# Altium PCB SPCE061A最小系统.PcbDoc (part 1 of 2)
Units mm, origin at the board's own origin, x right, y up, seen from the top; angles counter-clockwise.
Board outline 152.4 x 101.6 mm, 2 copper layers (Top Layer, Bottom Layer); 47 components, 59 nets, 230 pads, 3 vias.
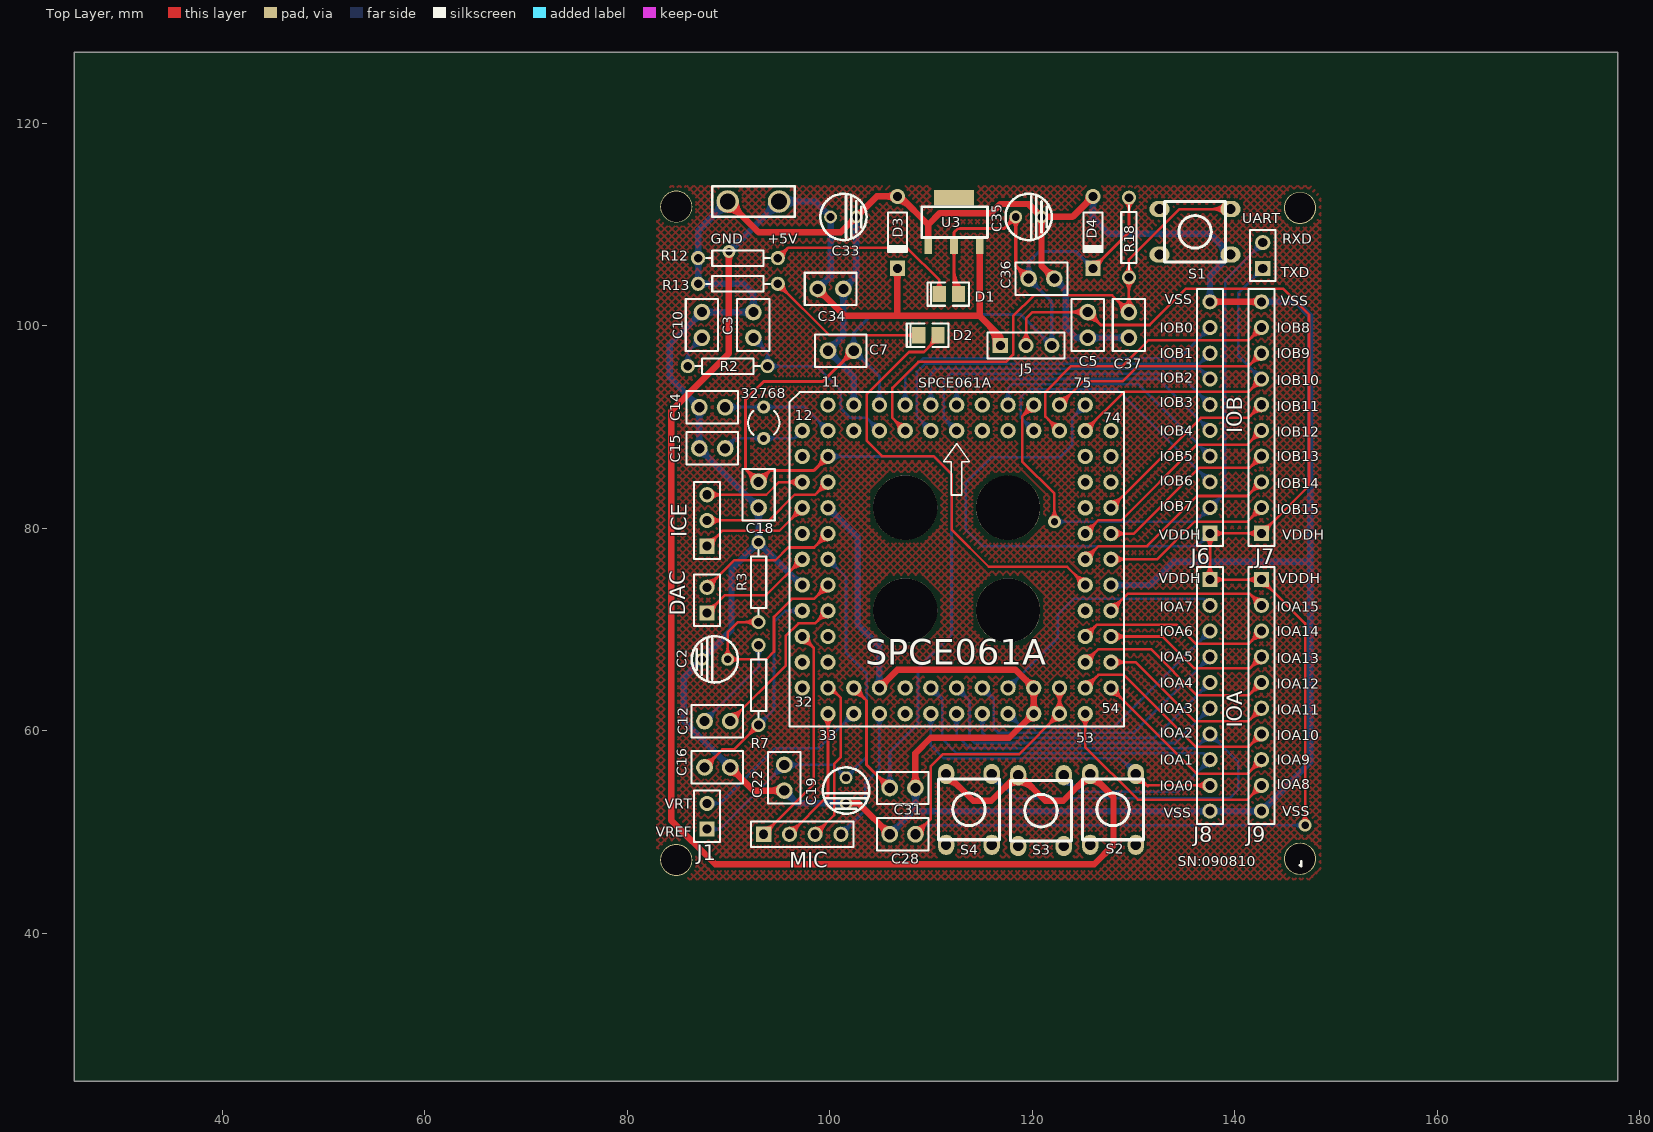
[diagram p0: Top Layer view]
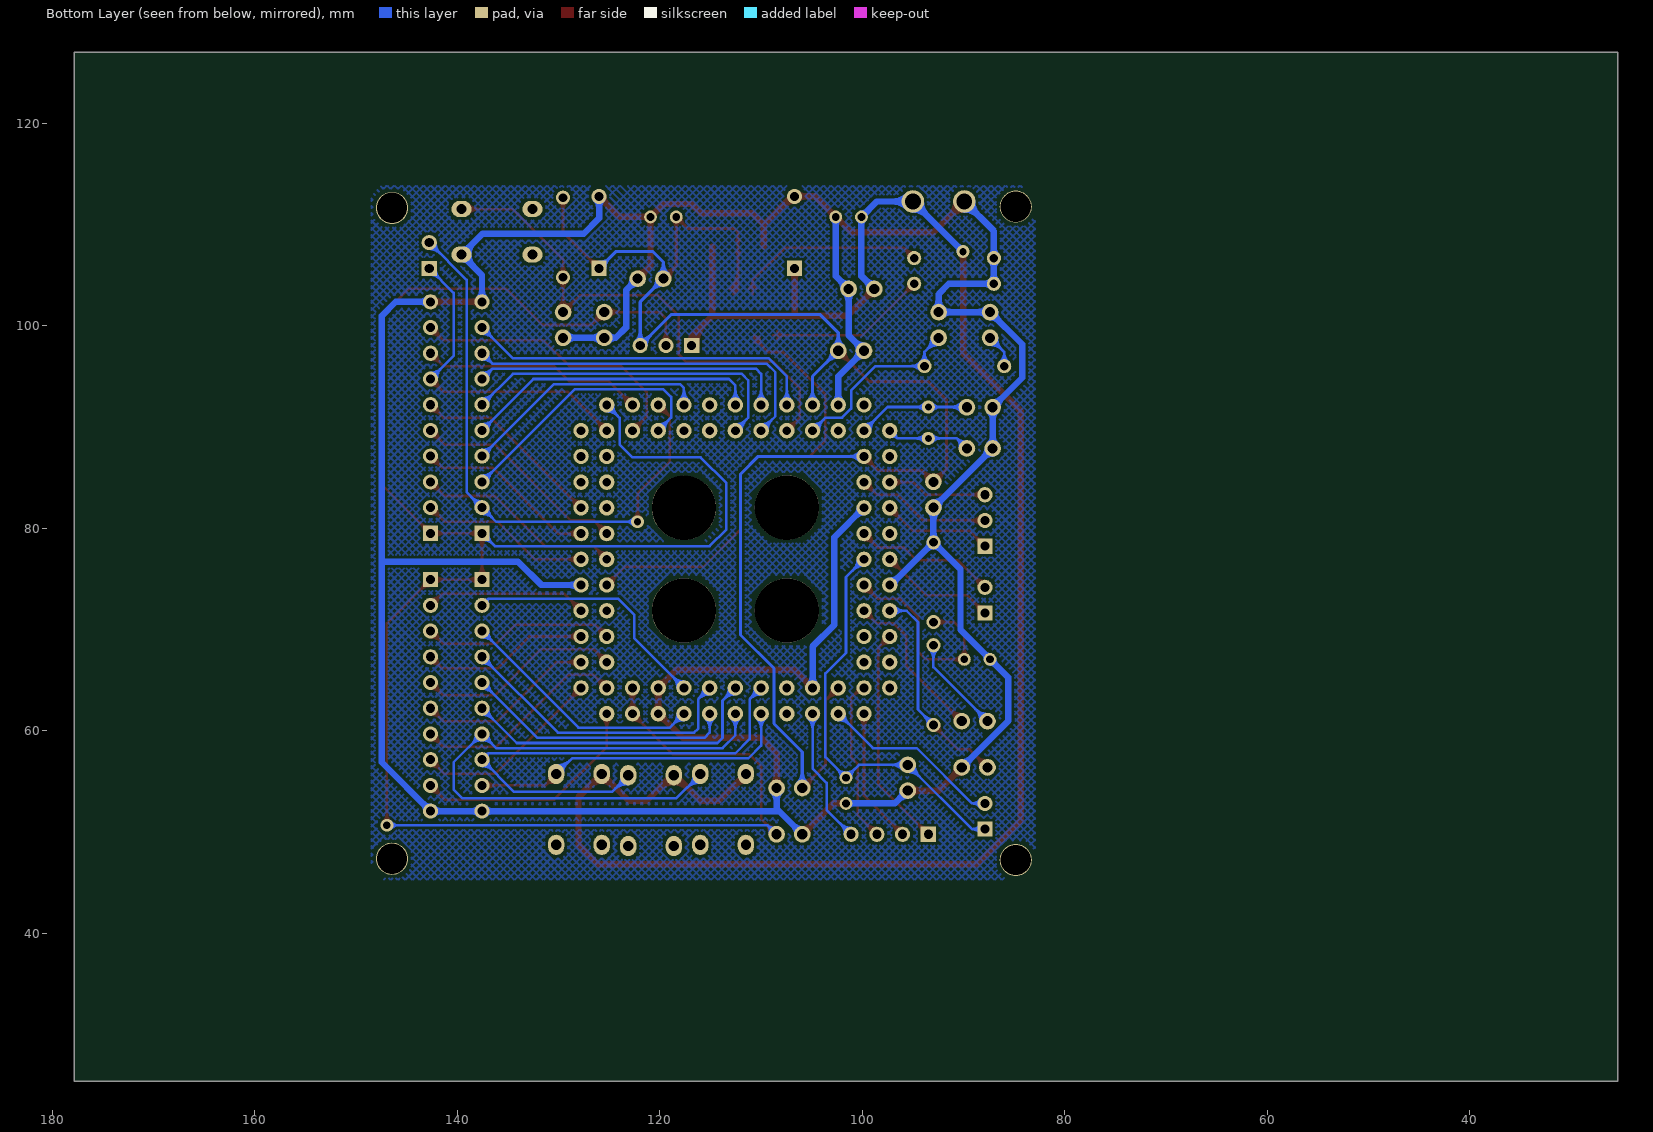
[diagram p1: Bottom Layer view, seen from below]

## Layer stack, top to bottom
Top Layer: signal copper 0.0356
Dielectric: dielectric 0.32, FR-4, Dk 4.8
Bottom Layer: signal copper 0.0356

## Board outline
25.4,25.4 177.8,25.4 177.8,127 25.4,127

## Design rules (kind name [scope] priority, off if disabled: settings)
Clearance [All] p1: gap=0.254
ComponentClearance [All] p1: gap=0.254 collisioncheckmode=3 verticalgap=0.254
PolygonConnect [All] p1: connectstyle=Relief reliefconductorwidth=0.254 reliefentries=4 polygonreliefangle="90 Angle"
RoutingVias [All] p1: holewidth=0.711 width=1.27 viastyle="Through Hole" minholewidth=0.711 minwidth=1.27 maxholewidth=0.711 maxwidth=1.27
SolderMaskExpansion [All] p1: expansion=0.102
TestPointUsage [All] p1: valid=0 allowmultiple=FALSE
Testpoint [All] p1: side=15 testpointundercomponent=TRUE minsize=1.016 maxsize=2.54 preferedsize=1.524 minholesize=0 maxholesize=1.016 preferedholesize=0.813 testpointgrid=0.025 style=1023 order=0123456789
Width VDD [InNet('VDD')] p1: maxlimit=0.305 minlimit=0.305 preferedwidth=0.305
Width VCC [InNet('V5')] p2: maxlimit=0.635 minlimit=0.635 preferedwidth=0.635
Width VSS [InNet('VSS')] p3: maxlimit=0.635 minlimit=0.635 preferedwidth=0.635
Width [All] p4: maxlimit=0.254 minlimit=0.254 preferedwidth=0.254
17 further rules are at their usual default settings.

## Components (designator, comment, footprint, x,y, rotation, side; value= is the part's Value field where it differs from the comment)
32768 "XTAL" BCY-W2/D3.1 93.472,90.424 r0 top
+5V "POWER" POWERPF 89.916,112.268 r0 top
C2 "Cap Pol1" cap2 94.488,67.056 r180 top
C3 "Cap" CAPR2.54-5.1x3.2 92.456,100.076 r270 top
C5 "Cap" CAPR2.54-5.1x3.2 125.476,100.076 r90 top
C7 "Cap" CAPR2.54-5.1x3.2 101.092,97.536 r0 top
C10 "Cap" CAPR2.54-5.1x3.2 87.376,100.076 r270 top
C12 "Cap" CAPR2.54-5.1x3.2 88.9,60.96 r180 top
C14 "Cap" CAPR2.54-5.1x3.2 88.392,91.948 r0 top
C15 "Cap" CAPR2.54-5.1x3.2 88.392,87.884 r180 top
C16 "Cap" CAPR2.54-5.1x3.2 88.9,56.388 r0 top
C18 "Cap" CAPR2.54-5.1x3.2 92.964,83.312 r90 top
C19 "Cap Pol1" cap2 101.6,59.944 r270 top
C22 "Cap" CAPR2.54-5.1x3.2 95.504,55.372 r90 top
C28 "Cap" CAPR2.54-5.1x3.2 107.188,49.784 r0 top
C31 "Cap" CAPR2.54-5.1x3.2 107.188,54.356 r180 top
C33 "Cap Pol1" cap2 95.504,110.744 r0 top
C34 "Cap" CAPR2.54-5.1x3.2 100.076,103.632 r180 top
C35 "Cap Pol1" cap2 113.792,110.744 r0 top
C36 "Cap" CAPR2.54-5.1x3.2 120.904,104.648 r180 top
C37 "Cap" CAPR2.54-5.1x3.2 129.54,100.076 r270 top
D1 "LED3" "SMD _LED" 111.76,103.124 r0 top
D2 "LED3" "SMD _LED" 109.728,99.06 r0 top
D3 "Diode 1N4148" DIO7.1-3.9x1.9 106.68,109.22 r270 top
D4 "Diode 1N4148" DIO7.1-3.9x1.9 125.984,109.22 r270 top
DAC "Header 2" HDR1X2 87.884,71.628 r90 top (schematic designator DAC_input)
ICE "Header 3" HDR1X3 87.884,78.232 r90 top
J1 "Header 2" HDR1X2 87.884,50.292 r90 top
J5 "Header 3" HDR1X3 116.84,98.044 r0 top
J6 "IOB0~IOB7" HDR1X10 137.541,79.502 r90 top
J7 "IOB8~IOB15" HDR1X10 142.621,79.502 r90 top
J8 "IOA0~IOA7" HDR1X10 137.541,74.93 r270 top
J9 "IOA8~IOA15" HDR1X10 142.621,74.93 r270 top
MIC "Header 4" HDR1X4 93.472,49.784 r0 top
R2 "Res2" RSE 89.916,96.012 r0 top
R3 "Res2" RSE 92.964,74.676 r90 top
R7 "Res2" RSE 92.964,64.516 r90 top
R12 "Res2" RSE 90.932,106.68 r180 top
R13 "Res2" RSE 90.932,104.14 r180 top
R18 "Res2" RSE 129.54,108.712 r90 top
S1 "KEY" an-6*6 142.24,104.14 r0 top
S2 "KEY2" an-6*6 133.096,58.42 r90 top
S3 "KEY3" an-6*6 125.984,58.293 r90 top
S4 "KEY4" an-6*6 118.872,58.42 r90 top
SPCE061A "PLCC84" SPCE061A_PLCC84 -647.827,740.156 r90 top
U3 "LM7833" A1117 112.268,113.792 r0 top
UART "Header 2" HDR1X2 142.748,105.664 r90 top

## Footprints (in the part's own frame and the unit in brackets; to place one, negate y for a bottom-side part, rotate by r counter-clockwise, add the part's x,y. Pads: shape width x height; smd on the part's side, far side on the other; paste and mask are expansions set on the pad)
A1117 [mil] "3.3V"
  rect 30x60 smd: 1(-100,-235) 2(0,-235) 3(100,-235)
  rect 155x60 smd: 4(0,-45)
  silkscreen extent -125,-200 130,-80
an-6*6 [mm] "按键"
  oval 2x1.6 hole 1: 1(-9.675,7.381) 1(-2.675,7.381) 2(-9.675,2.881) 2(-2.675,2.881)
  silkscreen extent -9.17,2.13 -3.17,8.13
BCY-W2/D3.1 [mm] "Crystal, Thru-Hole; 2 Leads; Body 3.1 x 8.2 mm (Dia.xH)"
  round 1.3 hole 0.7: 1(0,1.55) 2(0,-1.55)
  silkscreen extent -1.55,-1.19 1.55,1.17
cap2 [mil]
  round 50 hole 30: 1(180,0) 2(280,0)
  silkscreen extent 140,-90 320,90
CAPR2.54-5.1x3.2 [mm] "Capacitor, Ceramic, Thru-Hole, Dipped Radial; Body 5.1 x 3.2 mm (WxT) Pin Spacing 2.54 mm (typ)"
  round 1.65 hole 1: 1(-1.27,0) 2(1.27,0)
  silkscreen extent -2.55,-1.6 2.55,1.6
DIO7.1-3.9x1.9 [mm] "Diode, Axial; Body 3.8 x 1.9 mm (LxDia. max), Lead Dia. 0.53 mm (max)"
  round 1.5 hole 0.9: 1(-3.55,0)
  rect 1.5x1.5 hole 0.9: 2(3.55,0)
  silkscreen extent -1.95,-0.95 2.05,0.95
HDR1X2 [mm] "Connector; Header; 2 Position"
  rect 1.5x1.5 hole 0.9: 1(0,0)
  round 1.5 hole 0.9: 2(2.54,0)
  silkscreen extent -1.27,-1.27 3.81,1.27
HDR1X3 [mm] "Connector; Header; 3 Position"
  rect 1.5x1.5 hole 0.9: 1(0,0)
  round 1.5 hole 0.9: 2(2.54,0) 3(5.08,0)
  silkscreen extent -1.27,-1.27 6.35,1.27
HDR1X4 [mm] "Connector; Header; 4 Position"
  rect 1.5x1.5 hole 0.9: 1(0,0)
  round 1.5 hole 0.9: 2(2.54,0) 3(5.08,0) 4(7.62,0)
  silkscreen extent -1.27,-1.27 8.89,1.27
HDR1X10 [mm] "Connector; Header; 10 Position"
  rect 1.5x1.5 hole 0.9: 1(0,0)
  round 1.5 hole 0.9: 2(2.54,0) 3(5.08,0) 4(7.62,0) 5(10.16,0) 6(12.7,0) 7(15.24,0) 8(17.78,0) 9(20.32,0) 10(22.86,0)
  silkscreen extent -1.27,-1.27 24.13,1.27
POWERPF [mm] "POWER"
  round 2.224 hole 1.562: 1(0,0) 2(5.08,0)
  silkscreen extent -1.52,-1.52 6.6,1.52
RSE [mm] "直插电阻1/8W"
  round 1.4 hole 0.85: 1(-3.937,0) 2(3.937,0)
  silkscreen extent -3.17,-0.76 3.17,0.76
"SMD _LED" [mm] "SMT LED; 2 Leads"
  rect 1.3x1.6 smd: 1(0.95,0) 2(-0.95,0)
  silkscreen extent -2.13,-1.15 2,1.15
SPCE061A_PLCC84 [mil]
  round 60 hole 34: 1(-25511,-29935) 2(-25611,-29935) 3(-25511,-29835) 4(-25611,-29835) 5(-25511,-29735) 6(-25611,-29735) 7(-25511,-29635) 8(-25611,-29635) 9(-25511,-29535) 10(-25611,-29535) 11(-25511,-29435) 12(-25611,-29335) 13(-25611,-29435) 14(-25711,-29335) 15(-25711,-29435) 16(-25811,-29335) 17(-25811,-29435) 18(-25911,-29335) 19(-25911,-29435) 20(-26011,-29335) 21(-26011,-29435) 22(-26111,-29335) 23(-26111,-29435) 24(-26211,-29335) 25(-26211,-29435) 26(-26311,-29335) 27(-26311,-29435) 28(-26411,-29335) 29(-26411,-29435) 30(-26511,-29335) 31(-26511,-29435) 32(-26611,-29335) 33(-26711,-29435) 34(-26611,-29435) 35(-26711,-29535) 36(-26611,-29535) 37(-26711,-29635) 38(-26611,-29635) 39(-26711,-29735) 40(-26611,-29735) 41(-26711,-29835) 42(-26611,-29835) 43(-26711,-29935) 44(-26611,-29935) 45(-26711,-30035) 46(-26611,-30035) 47(-26711,-30135) 48(-26611,-30135) 49(-26711,-30235) 50(-26611,-30235) 51(-26711,-30335) 52(-26611,-30335) 53(-26711,-30435) 54(-26611,-30535) 55(-26611,-30435) 56(-26511,-30535) 57(-26511,-30435) 58(-26411,-30535) 59(-26411,-30435) 60(-26311,-30535) 61(-26311,-30435) 62(-26211,-30535) 63(-26211,-30435) 64(-26111,-30535) 65(-26111,-30435) 66(-26011,-30535) 67(-26011,-30435) 68(-25911,-30535) 69(-25911,-30435) 70(-25811,-30535) 71(-25811,-30435) 72(-25711,-30535) 73(-25711,-30435) 74(-25611,-30535) 75(-25511,-30435) 76(-25611,-30435) 77(-25511,-30335) 78(-25611,-30335) 79(-25511,-30235) 80(-25611,-30235) 81(-25511,-30135) 82(-25611,-30135) 83(-25511,-30035) 84(-25611,-30035)
  silkscreen extent -26761,-30585 -25461,-29285

## Part data
32768: "Crystal Oscillator"
C2 C19 C33 C35: "Polarized Capacitor (Radial)"
C3 C5 C7 C10 C12 C14 C15 C16 C18 C22 C28 C31 C34 C36 C37: "Capacitor"
D1 D2: "Typical BLUE SiC LED"
D3 D4: "High Conductance Fast Diode"
DAC J1 UART: "Header, 2-Pin"
ICE J5: "Header, 3-Pin"
J6 J7 J8 J9: library part "Header 10", "Header, 10-Pin"
MIC: "Header, 4-Pin"
R2 R3 R7 R12 R13 R18: "Resistor"
S2 S3 S4: library part KEY
SPCE061A: library part SPCE061A_PLCC84
U3: library part LM7805CT

## Free pads (board coordinates)
  round 6.35 hole 6.35: 1(107.442,71.882) 2(117.602,71.882) 3(117.602,82.017) 4(107.442,82.042)
  round 3.175 hole 2.997: 5(84.836,111.76) 6(146.431,111.633) 7(84.836,47.244) 8(146.431,47.371)

## Via types
v1: diameter 1.27, hole 0.711, Top Layer to Bottom Layer, 3 vias

## Nets (pads, with @x,y where several pads share a name; then routed paths per layer and width w, separated by ;. In a path a pad name is that pad's centre, name@x,y a point inside that pad or via, vN(x,y) a via of type N, cw(c..) or ccw(c..) an arc to the next point about the centre after c; other vN are vias at no path point)
ICE_EN: ICE.3 SPCE061A.16 | length 17.5
  Top Layer w0.254: ICE.3@87.884,83.312 93.726,83.312 94.971,84.557 SPCE061A.16@97.282,84.557 ; ICE.3@88.145,83.051 cw(c88.775,82.421) 88.775,83.312 cw(c88.775,84.203) ICE.3@88.145,83.573 ; ICE.3@88.325,82.871 cw(c89.388,81.808) 89.388,83.312 cw(c89.388,84.816) ICE.3@88.325,83.753 ; SPCE061A.16@96.833,84.108 ccw(c95.749,83.024) 95.749,84.557 ccw(c95.749,86.09) SPCE061A.16@96.833,85.006 ; SPCE061A.16@97.013,84.287 ccw(c96.362,83.637) 96.362,84.557 ccw(c96.362,85.476) SPCE061A.16@97.013,84.826
ICE_SCK: ICE.2 SPCE061A.17 | length 21.4
  Top Layer w0.254: ICE.2@87.63,80.772 93.98,80.772 96.52,83.312 98.552,83.312 99.797,84.557 SPCE061A.17@99.822,84.557 ; ICE.2@88.145,80.511 cw(c88.775,79.881) 88.775,80.772 cw(c88.775,81.663) ICE.2@88.145,81.033 ; ICE.2@88.325,80.331 cw(c89.388,79.268) 89.388,80.772 cw(c89.388,82.276) ICE.2@88.325,81.213 ; 98.695,83.455 cw(c99.822,82.327) SPCE061A.17@99.822,83.922 ; 98.756,83.516 ccw(c97.715,84.557) SPCE061A.17@99.187,84.557 ; 99.128,83.888 cw(c99.822,83.194) SPCE061A.17@99.822,84.176 ; 99.19,83.95 ccw(c98.583,84.557) SPCE061A.17@99.441,84.557
ICE_SDA: ICE.1 SPCE061A.18 | length 18.6
  Top Layer w0.254: ICE.1@87.884,78.232 89.408,79.756 95.021,79.756 SPCE061A.18@97.282,82.017 ; ICE.1@87.884,78.601 ccw(c87.884,79.492) 88.514,78.862 ccw(c89.144,78.232) ICE.1@88.253,78.232 ; ICE.1@87.884,78.855 ccw(c87.884,80.359) 88.948,79.296 ccw(c90.011,78.232) ICE.1@88.507,78.232 ; SPCE061A.18@96.647,82.017 cw(c95.114,82.017) 96.198,80.933 cw(c97.282,79.849) SPCE061A.18@97.282,81.382 ; SPCE061A.18@96.901,82.017 cw(c95.981,82.017) 96.632,81.366 cw(c97.282,80.716) SPCE061A.18@97.282,81.636
IOA0: J8.9 S2.2@130.215,55.745 SPCE061A.41 | length 46.4
  Top Layer w0.254: S2.2@130.215,55.745 130.215,55.713 131.318,54.61 J8.9@137.541,54.61 ; S2.2@130.279,55.131 cw(c130.417,54.248) 131.048,54.88 ; S2.2@130.318,54.88 cw(c130.512,53.636) 131.402,54.526 ; S2.2@130.888,55.545 ccw(c132.108,55.545) 131.245,54.683 ; J8.9@137.1,54.169 ccw(c136.037,53.106) 136.037,54.61 ccw(c136.037,56.114) J8.9@137.1,55.051 ; J8.9@137.28,54.349 ccw(c136.65,53.719) 136.65,54.61 ccw(c136.65,55.501) J8.9@137.28,54.871
  Bottom Layer w0.254: SPCE061A.41@109.533,61.248 cw(c108.449,60.164) 109.982,60.164 cw(c111.515,60.164) SPCE061A.41@110.431,61.248 ; SPCE061A.41@109.713,61.427 cw(c109.062,60.777) 109.982,60.777 cw(c110.902,60.777) SPCE061A.41@110.251,61.427 ; SPCE061A.41@109.982,61.697 109.982,58.547 111.252,57.277 128.651,57.277 S2.2@130.183,55.745 ; 128.767,57.161 ccw(c130.086,58.479) S2.2@130.181,56.617 ; 129.171,56.757 ccw(c130.125,57.71) S2.2@130.194,56.363 ; 129.231,56.697 cw(c128.478,55.945) S2.2@129.542,55.945
IOA1: J8.8 S3.2@123.103,55.618 SPCE061A.42 | length 61.4
  Bottom Layer w0.254: SPCE061A.42@109.982,63.602 cw(c109.982,62.007) 111.109,63.135 ; SPCE061A.42@109.982,63.856 cw(c109.982,62.874) 110.676,63.568 ; SPCE061A.42@109.982,64.237 110.007,64.237 111.125,63.119 111.125,59.182 112.522,57.785 136.906,57.785 ; SPCE061A.42@110.363,64.237 ccw(c111.221,64.237) 110.614,63.63 ; SPCE061A.42@110.617,64.237 ccw(c112.089,64.237) 111.048,63.196 ; S3.2@123.103,54.745 cw(c123.103,52.715) 124.539,54.15 ; S3.2@123.103,54.999 cw(c123.103,53.582) 124.105,54.584 ; S3.2@123.103,55.618 123.103,55.586 124.714,53.975 134.366,53.975 J8.8@137.541,57.15 136.906,57.785 ; S3.2@123.103,55.713 S3.2@123.103,55.745 ; S3.2@123.776,55.418 ccw(c124.996,55.418) 124.133,54.556 ; J8.8@136.918,57.15 cw(c135.414,57.15) 136.477,56.086 cw(c137.541,55.023) J8.8@137.541,56.527 ; J8.8@136.974,57.408 ccw(c136.669,57.548) 136.906,57.785 ; J8.8@137.172,57.15 cw(c136.281,57.15) 136.911,56.52 cw(c137.541,55.89) J8.8@137.541,56.781 ; J8.8@137.283,57.717 cw(c137.143,58.022) 136.906,57.785
IOA2: J8.7 S4.2@115.991,55.745 SPCE061A.43 | length 75.6
  Bottom Layer w0.254: SPCE061A.43@112.073,61.248 cw(c110.989,60.164) 112.522,60.164 cw(c114.055,60.164) SPCE061A.43@112.971,61.248 ; SPCE061A.43@112.253,61.427 cw(c111.602,60.777) 112.522,60.777 cw(c113.442,60.777) SPCE061A.43@112.791,61.427 ; SPCE061A.43@112.522,61.697 112.522,59.563 113.792,58.293 136.144,58.293 J8.7@137.541,59.69 140.335,56.896 140.335,54.229 139.446,53.34 118.364,53.34 115.991,55.713 S4.2@115.991,55.745 ; S4.2@115.991,54.872 cw(c115.991,52.842) 117.427,54.277 ; S4.2@115.991,55.126 cw(c115.991,53.709) 116.993,54.711 ; S4.2@116.664,55.545 ccw(c117.884,55.545) 117.021,54.683 ; J8.7@136.918,59.69 cw(c135.414,59.69) 136.477,58.626 cw(c137.541,57.563) 137.541,59.067 cw(c137.541,57.563) 138.605,58.626 cw(c139.668,59.69) J8.7@138.164,59.69 ; J8.7@137.172,59.69 cw(c136.281,59.69) 136.911,59.06 cw(c137.541,58.43) 137.541,59.321 cw(c137.541,58.43) 138.171,59.06 cw(c138.801,59.69) J8.7@137.91,59.69
IOA3: J8.6 SPCE061A.44 | length 38.5
  Bottom Layer w0.254: SPCE061A.44@112.522,63.602 cw(c112.522,62.007) 113.649,63.135 ; SPCE061A.44@112.522,63.856 cw(c112.522,62.874) 113.216,63.568 ; SPCE061A.44@112.522,64.237 112.547,64.237 113.792,62.992 113.792,59.309 114.3,58.801 134.112,58.801 J8.6@137.541,62.23 ; SPCE061A.44@112.903,64.237 ccw(c113.761,64.237) 113.154,63.63 ; SPCE061A.44@113.157,64.237 ccw(c114.629,64.237) 113.588,63.196 ; J8.6@136.918,62.23 cw(c135.414,62.23) 136.477,61.166 cw(c137.541,60.103) J8.6@137.541,61.607 ; J8.6@137.172,62.23 cw(c136.281,62.23) 136.911,61.6 cw(c137.541,60.97) J8.6@137.541,61.861
IOA4: J8.5 SPCE061A.45 | length 34.4
  Bottom Layer w0.254: SPCE061A.45@114.613,61.248 cw(c113.529,60.164) 115.062,60.164 cw(c116.595,60.164) SPCE061A.45@115.511,61.248 ; SPCE061A.45@114.793,61.427 cw(c114.142,60.777) 115.062,60.777 cw(c115.982,60.777) SPCE061A.45@115.331,61.427 ; SPCE061A.45@115.062,61.697 115.062,59.817 115.57,59.309 132.08,59.309 J8.5@137.541,64.77 ; J8.5@136.918,64.77 cw(c135.414,64.77) 136.477,63.706 cw(c137.541,62.643) J8.5@137.541,64.147 ; J8.5@137.172,64.77 cw(c136.281,64.77) 136.911,64.14 cw(c137.541,63.51) J8.5@137.541,64.401
IOA5: J8.4 SPCE061A.46 | length 36.7
  Bottom Layer w0.254: SPCE061A.46@115.062,63.602 cw(c115.062,62.007) 116.189,63.135 ; SPCE061A.46@115.062,63.856 cw(c115.062,62.874) 115.756,63.568 ; SPCE061A.46@115.062,64.237 115.087,64.237 116.205,63.119 116.205,60.198 116.586,59.817 130.048,59.817 J8.4@137.541,67.31 ; SPCE061A.46@115.443,64.237 ccw(c116.301,64.237) 115.694,63.63 ; SPCE061A.46@115.697,64.237 ccw(c117.169,64.237) 116.128,63.196 ; J8.4@136.918,67.31 cw(c135.414,67.31) 136.477,66.246 cw(c137.541,65.183) J8.4@137.541,66.687 ; J8.4@137.172,67.31 cw(c136.281,67.31) 136.911,66.68 cw(c137.541,66.05) J8.4@137.541,66.941
IOA6: J8.3 SPCE061A.47 | length 32.1
  Bottom Layer w0.254: SPCE061A.47@117.602,61.062 cw(c117.602,59.467) 118.729,60.595 ; SPCE061A.47@117.602,61.316 cw(c117.602,60.334) 118.296,61.028 ; SPCE061A.47@117.602,61.697 117.627,61.697 118.999,60.325 128.016,60.325 J8.3@137.541,69.85 ; SPCE061A.47@117.983,61.697 ccw(c118.841,61.697) 118.234,61.09 ; SPCE061A.47@118.237,61.697 ccw(c119.709,61.697) 118.668,60.656 ; J8.3@136.918,69.85 cw(c135.414,69.85) 136.477,68.786 cw(c137.541,67.723) J8.3@137.541,69.227 ; J8.3@137.172,69.85 cw(c136.281,69.85) 136.911,69.22 cw(c137.541,68.59) J8.3@137.541,69.481
IOA7: J8.2 SPCE061A.48 | length 29.9
  Bottom Layer w0.254: SPCE061A.48@117.602,64.237 122.501,69.136 122.501,71.447 124.079,73.025 136.906,73.025 ; SPCE061A.48@117.602,64.618 ccw(c117.602,65.537) 118.252,64.887 ccw(c118.903,64.237) SPCE061A.48@117.983,64.237 ; SPCE061A.48@117.602,64.872 ccw(c117.602,66.405) 118.686,65.321 ccw(c119.77,64.237) SPCE061A.48@118.237,64.237 ; J8.2@136.974,72.648 ccw(c136.669,72.788) 136.906,73.025 ; J8.2@137.283,72.957 cw(c137.143,73.262) 136.906,73.025 ; J8.2@137.541,72.39 136.906,73.025
IOA8: J9.9 SPCE061A.53 | length 31.1
  Top Layer w0.254: SPCE061A.53@124.773,61.248 cw(c123.689,60.164) 125.222,60.164 cw(c126.755,60.164) SPCE061A.53@125.671,61.248 ; SPCE061A.53@124.953,61.427 cw(c124.302,60.777) 125.222,60.777 cw(c126.142,60.777) SPCE061A.53@125.491,61.427 ; SPCE061A.53@125.247,61.697 SPCE061A.53@125.222,61.697 125.222,58.42 130.429,53.213 141.224,53.213 J9.9@142.621,54.61 ; J9.9@141.998,54.61 cw(c140.494,54.61) 141.557,53.546 cw(c142.621,52.483) J9.9@142.621,53.987 ; J9.9@142.252,54.61 cw(c141.361,54.61) 141.991,53.98 cw(c142.621,53.35) J9.9@142.621,54.241
IOA9: J9.8 SPCE061A.54 | length 26.6
  Top Layer w0.254: SPCE061A.54@127.762,63.602 cw(c127.762,62.069) 128.846,63.153 cw(c129.93,64.237) SPCE061A.54@128.397,64.237 ; SPCE061A.54@127.762,63.856 cw(c127.762,62.936) 128.412,63.586 cw(c129.063,64.237) SPCE061A.54@128.143,64.237 ; SPCE061A.54@127.762,64.237 136.246,55.753 141.224,55.753 J9.8@142.621,57.15 ; J9.8@141.998,57.15 cw(c140.494,57.15) 141.557,56.086 cw(c142.621,55.023) J9.8@142.621,56.527 ; J9.8@142.252,57.15 cw(c141.361,57.15) 141.991,56.52 cw(c142.621,55.89) J9.8@142.621,56.781
IOA10: J9.7 SPCE061A.55 | length 29
  Top Layer w0.254: SPCE061A.55@125.222,64.237 126.517,65.532 129.032,65.532 136.144,58.42 141.351,58.42 J9.7@142.621,59.69 ; SPCE061A.55@125.222,64.618 ccw(c125.222,65.537) 125.872,64.887 ccw(c126.523,64.237) SPCE061A.55@125.603,64.237 ; SPCE061A.55@125.222,64.872 ccw(c125.222,66.405) 126.306,65.321 ccw(c127.39,64.237) SPCE061A.55@125.857,64.237 ; J9.7@141.998,59.69 cw(c140.494,59.69) 141.557,58.626 cw(c142.621,57.563) J9.7@142.621,59.067 ; J9.7@142.252,59.69 cw(c141.361,59.69) 141.991,59.06 cw(c142.621,58.43) J9.7@142.621,59.321
IOA11: J9.6 SPCE061A.56 | length 25.4
  Top Layer w0.254: SPCE061A.56@127.762,66.777 130.2,66.777 136.017,60.96 141.351,60.96 J9.6@142.621,62.23 ; SPCE061A.56@128.031,66.507 cw(c128.682,65.857) 128.682,66.777 cw(c128.682,67.696) SPCE061A.56@128.031,67.046 ; SPCE061A.56@128.211,66.328 cw(c129.295,65.244) 129.295,66.777 cw(c129.295,68.31) SPCE061A.56@128.211,67.226 ; J9.6@141.998,62.23 cw(c140.494,62.23) 141.557,61.166 cw(c142.621,60.103) J9.6@142.621,61.607 ; J9.6@142.252,62.23 cw(c141.361,62.23) 141.991,61.6 cw(c142.621,60.97) J9.6@142.621,61.861
IOA12: J9.5 SPCE061A.57 | length 28
  Top Layer w0.254: SPCE061A.57@125.222,66.777 126.517,68.072 131.699,68.072 136.271,63.5 141.351,63.5 J9.5@142.621,64.77 ; SPCE061A.57@125.222,67.158 ccw(c125.222,68.077) 125.872,67.427 ccw(c126.523,66.777) SPCE061A.57@125.603,66.777 ; SPCE061A.57@125.222,67.412 ccw(c125.222,68.945) 126.306,67.861 ccw(c127.39,66.777) SPCE061A.57@125.857,66.777 ; J9.5@141.998,64.77 cw(c140.494,64.77) 141.557,63.706 cw(c142.621,62.643) J9.5@142.621,64.147 ; J9.5@142.252,64.77 cw(c141.361,64.77) 141.991,64.14 cw(c142.621,63.51) J9.5@142.621,64.401
IOA13: J9.4 SPCE061A.58 | length 24.3
  Top Layer w0.254: SPCE061A.58@127.762,69.317 132.867,69.317 136.017,66.167 141.478,66.167 J9.4@142.621,67.31 ; SPCE061A.58@128.031,69.047 cw(c128.682,68.397) 128.682,69.317 cw(c128.682,70.236) SPCE061A.58@128.031,69.586 ; SPCE061A.58@128.211,68.868 cw(c129.295,67.784) 129.295,69.317 cw(c129.295,70.85) SPCE061A.58@128.211,69.766 ; J9.4@141.998,67.31 cw(c140.494,67.31) 141.557,66.246 cw(c142.621,65.183) J9.4@142.621,66.687 ; J9.4@142.252,67.31 cw(c141.361,67.31) 141.991,66.68 cw(c142.621,66.05) J9.4@142.621,66.941
IOA14: J9.3 SPCE061A.59 | length 26.8
  Top Layer w0.254: SPCE061A.59@125.222,69.317 125.222,69.342 126.365,70.485 134.239,70.485 136.144,68.58 141.351,68.58 J9.3@142.621,69.85 ; SPCE061A.59@125.222,69.698 ccw(c125.222,70.556) 125.829,69.949 ; SPCE061A.59@125.222,69.952 ccw(c125.222,71.423) 126.263,70.383 ; SPCE061A.59@125.603,69.317 cw(c126.584,69.317) 125.89,70.01 ; SPCE061A.59@125.857,69.317 cw(c127.451,69.317) 126.324,70.444 ; J9.3@141.998,69.85 cw(c140.494,69.85) 141.557,68.786 cw(c142.621,67.723) J9.3@142.621,69.227 ; J9.3@142.252,69.85 cw(c141.361,69.85) 141.991,69.22 cw(c142.621,68.59) J9.3@142.621,69.481
IOA15: J9.2 SPCE061A.60 | length 23.7
  Top Layer w0.254: SPCE061A.60@127.762,71.857 127.762,71.882 129.413,73.533 141.478,73.533 J9.2@142.621,72.39 ; SPCE061A.60@127.762,72.238 ccw(c127.762,73.096) 128.369,72.489 ; SPCE061A.60@127.762,72.492 ccw(c127.762,73.963) 128.803,72.923 ; SPCE061A.60@128.143,71.857 cw(c129.124,71.857) 128.43,72.55 ; SPCE061A.60@128.397,71.857 cw(c129.991,71.857) 128.864,72.984 ; J9.2@141.998,72.39 ccw(c140.494,72.39) 141.557,73.454 ccw(c142.621,74.517) J9.2@142.621,73.013 ; J9.2@142.252,72.39 ccw(c141.361,72.39) 141.991,73.02 ccw(c142.621,73.65) J9.2@142.621,72.759
IOB0: J6.9 SPCE061A.5 | length 42.5
  Bottom Layer w0.254: SPCE061A.5@106.993,92.626 ccw(c105.909,93.71) 107.442,93.71 ccw(c108.975,93.71) SPCE061A.5@107.891,92.626 ; SPCE061A.5@107.173,92.446 ccw(c106.522,93.096) 107.442,93.096 ccw(c108.362,93.096) SPCE061A.5@107.711,92.446 ; SPCE061A.5@107.442,92.202 107.442,94.996 109.22,96.774 134.493,96.774 J6.9@137.541,99.822 ; J6.9@136.918,99.822 cw(c135.414,99.822) 136.477,98.758 cw(c137.541,97.695) J6.9@137.541,99.199 ; J6.9@137.172,99.822 cw(c136.281,99.822) 136.911,99.192 cw(c137.541,98.562) J6.9@137.541,99.453
IOB1: J6.8 SPCE061A.4 | length 43.4
  Bottom Layer w0.254: 108.88,90.764 cw(c107.753,89.637) SPCE061A.4@109.347,89.637 ; 108.941,90.703 ccw(c109.982,91.743) SPCE061A.4@109.982,90.272 ; 109.314,90.33 cw(c108.62,89.637) SPCE061A.4@109.601,89.637 ; 109.375,90.269 ccw(c109.982,90.876) SPCE061A.4@109.982,90.018 ; SPCE061A.4@109.982,89.637 109.982,89.662 108.585,91.059 108.585,95.421 109.43,96.266 136.525,96.266 ; J6.8@136.918,97.262 cw(c135.574,97.217) 136.525,96.266 ; J6.8@137.172,97.27 cw(c136.376,97.244) 136.939,96.68 cw(c137.503,96.117) J6.8@137.529,96.913 ; J6.8@137.521,96.659 ccw(c137.476,95.315) 136.525,96.266 ; J6.8@137.541,97.282 136.525,96.266
IOB2: J6.7 SPCE061A.3 | length 38.6
  Bottom Layer w0.254: SPCE061A.3@109.533,92.626 ccw(c108.449,93.71) 109.982,93.71 ccw(c111.515,93.71) SPCE061A.3@110.431,92.626 ; SPCE061A.3@109.713,92.446 ccw(c109.062,93.096) 109.982,93.096 ccw(c110.902,93.096) SPCE061A.3@110.251,92.446 ; SPCE061A.3@109.982,92.177 109.982,95.25 110.49,95.758 136.525,95.758 ; J6.7@136.918,94.762 ccw(c135.574,94.807) 136.525,95.758 ; J6.7@137.172,94.754 ccw(c136.376,94.78) 136.939,95.344 ccw(c137.503,95.907) J6.7@137.529,95.111 ; J6.7@137.521,95.365 cw(c137.476,96.709) 136.525,95.758 ; J6.7@137.541,94.742 136.525,95.758
IOB3: J6.6 SPCE061A.2 | length 40.9
  Bottom Layer w0.254: 111.42,90.764 cw(c110.293,89.637) SPCE061A.2@111.887,89.637 ; 111.481,90.703 ccw(c112.522,91.743) SPCE061A.2@112.522,90.272 ; 111.854,90.33 cw(c111.16,89.637) SPCE061A.2@112.141,89.637 ; 111.915,90.269 ccw(c112.522,90.876) SPCE061A.2@112.522,90.018 ; SPCE061A.2@112.522,89.637 112.522,89.662 111.252,90.932 111.252,94.615 111.887,95.25 134.493,95.25 J6.6@137.541,92.202 ; J6.6@136.918,92.202 ccw(c135.414,92.202) 136.477,93.266 ccw(c137.541,94.329) J6.6@137.541,92.825 ; J6.6@137.172,92.202 ccw(c136.281,92.202) 136.911,92.832 ccw(c137.541,93.462) J6.6@137.541,92.571
IOB4: J6.5 SPCE061A.1 | length 36.9
  Bottom Layer w0.254: SPCE061A.1@112.073,92.626 ccw(c110.989,93.71) 112.522,93.71 ccw(c114.055,93.71) SPCE061A.1@112.971,92.626 ; SPCE061A.1@112.253,92.446 ccw(c111.602,93.096) 112.522,93.096 ccw(c113.442,93.096) SPCE061A.1@112.791,92.446 ; SPCE061A.1@112.522,92.177 112.522,94.107 113.157,94.742 132.461,94.742 J6.5@137.541,89.662 ; J6.5@136.918,89.662 ccw(c135.414,89.662) 136.477,90.726 ccw(c137.541,91.789) J6.5@137.541,90.285 ; J6.5@137.172,89.662 ccw(c136.281,89.662) 136.911,90.292 ccw(c137.541,90.922) J6.5@137.541,90.031
IOB5: J6.4 SPCE061A.81 | length 32.3
  Bottom Layer w0.254: SPCE061A.81@117.153,92.626 ccw(c116.069,93.71) 117.602,93.71 ccw(c119.135,93.71) SPCE061A.81@118.051,92.626 ; SPCE061A.81@117.333,92.446 ccw(c116.682,93.096) 117.602,93.096 ccw(c118.522,93.096) SPCE061A.81@117.871,92.446 ; SPCE061A.81@117.602,92.177 117.602,93.853 117.983,94.234 130.429,94.234 J6.4@137.541,87.122 ; J6.4@136.918,87.122 ccw(c135.414,87.122) 136.477,88.186 ccw(c137.541,89.249) J6.4@137.541,87.745 ; J6.4@137.172,87.122 ccw(c136.281,87.122) 136.911,87.752 ccw(c137.541,88.382) J6.4@137.541,87.491
IOB6: J6.3 SPCE061A.80 | length 34.2
  Bottom Layer w0.254: 119.04,90.764 cw(c117.913,89.637) SPCE061A.80@119.507,89.637 ; 119.101,90.703 ccw(c120.142,91.743) SPCE061A.80@120.142,90.272 ; 119.474,90.33 cw(c118.78,89.637) SPCE061A.80@119.761,89.637 ; 119.535,90.269 ccw(c120.142,90.876) SPCE061A.80@120.142,90.018 ; SPCE061A.80@120.142,89.637 120.142,89.662 118.872,90.932 118.872,92.964 119.634,93.726 128.397,93.726 J6.3@137.541,84.582 ; J6.3@136.918,84.582 ccw(c135.414,84.582) 136.477,85.646 ccw(c137.541,86.709) J6.3@137.541,85.205 ; J6.3@137.172,84.582 ccw(c136.281,84.582) 136.911,85.212 ccw(c137.541,85.842) J6.3@137.541,84.951
IOB7: J6.2 SPCE061A.79 UART.2 | length 76.6
  Top Layer w0.254: 119.015,91.075 cw(c120.142,89.947) SPCE061A.79@120.142,91.542 ; 119.076,91.136 ccw(c118.035,92.177) SPCE061A.79@119.507,92.177 ; 119.448,91.508 cw(c120.142,90.814) SPCE061A.79@120.142,91.796 ; 119.51,91.57 ccw(c118.903,92.177) SPCE061A.79@119.761,92.177 ; SPCE061A.79@120.142,92.177 120.117,92.177 118.999,91.059 118.999,86.614 122.174,83.439 v1(122.174,80.645) ; v1@121.815,81.004 ccw(c120.948,81.871) 122.174,81.871 ccw(c123.4,81.871) v1@122.533,81.004
  Bottom Layer w0.254: SPCE061A.79@120.142,92.177 SPCE061A.79@120.142,92.202 ; v1(122.174,80.645) 136.144,80.645 139.065,83.566 139.065,104.521 UART.2@142.748,108.204 ; v1@122.533,80.286 cw(c123.4,79.419) 123.4,80.645 cw(c123.4,81.871) v1@122.533,81.004 ; J6.2@136.918,82.042 cw(c135.414,82.042) 136.477,80.978 cw(c137.541,79.915) J6.2@137.541,81.419 ; J6.2@137.172,82.042 cw(c136.281,82.042) 136.911,81.412 cw(c137.541,80.782) J6.2@137.541,81.673 ; J6.2@137.541,82.411 ccw(c137.541,83.302) 138.171,82.672 ccw(c138.801,82.042) J6.2@137.91,82.042 ; J6.2@137.541,82.665 ccw(c137.541,84.169) 138.605,83.106 ccw(c139.668,82.042) J6.2@138.164,82.042 ; UART.2@142.125,108.204 cw(c140.621,108.204) 141.684,107.14 cw(c142.748,106.077) UART.2@142.748,107.581 ; UART.2@142.379,108.204 cw(c141.488,108.204) 142.118,107.574 cw(c142.748,106.944) UART.2@142.748,107.835
IOB8: J7.9 SPCE061A.78 | length 36
  Top Layer w0.254: SPCE061A.78@122.047,89.637 ccw(c120.514,89.637) 121.598,90.721 ccw(c122.682,91.805) SPCE061A.78@122.682,90.272 ; SPCE061A.78@122.301,89.637 ccw(c121.381,89.637) 122.032,90.287 ccw(c122.682,90.937) SPCE061A.78@122.682,90.018 ; SPCE061A.78@122.682,89.637 121.285,91.034 121.285,93.472 123.825,96.012 128.905,96.012 131.445,98.552 141.351,98.552 J7.9@142.621,99.822 ; J7.9@141.998,99.822 cw(c140.494,99.822) 141.557,98.758 cw(c142.621,97.695) J7.9@142.621,99.199 ; J7.9@142.252,99.822 cw(c141.361,99.822) 141.991,99.192 cw(c142.621,98.562) J7.9@142.621,99.453
IOB9: J7.8 SPCE061A.77 | length 29.7
  Top Layer w0.254: SPCE061A.77@122.682,92.177 125.013,94.508 128.925,94.508 130.429,96.012 141.351,96.012 J7.8@142.621,97.282 ; SPCE061A.77@122.682,92.558 ccw(c122.682,93.477) 123.332,92.827 ccw(c123.983,92.177) SPCE061A.77@123.063,92.177 ; SPCE061A.77@122.682,92.812 ccw(c122.682,94.345) 123.766,93.261 ccw(c124.85,92.177) SPCE061A.77@123.317,92.177 ; J7.8@141.998,97.282 cw(c140.494,97.282) 141.557,96.218 cw(c142.621,95.155) J7.8@142.621,96.659 ; J7.8@142.252,97.282 cw(c141.361,97.282) 141.991,96.652 cw(c142.621,96.022) J7.8@142.621,96.913
IOB10: J7.7 SPCE061A.76 UART.1 | length 47.5
  Top Layer w0.254: SPCE061A.76@125.222,89.637 129.057,93.472 141.351,93.472 J7.7@142.621,94.742 ; SPCE061A.76@125.222,90.018 ccw(c125.222,90.937) 125.872,90.287 ccw(c126.523,89.637) SPCE061A.76@125.603,89.637 ; SPCE061A.76@125.222,90.272 ccw(c125.222,91.805) 126.306,90.721 ccw(c127.39,89.637) SPCE061A.76@125.857,89.637 ; J7.7@141.998,94.742 cw(c140.494,94.742) 141.557,93.678 cw(c142.621,92.615) J7.7@142.621,94.119 ; J7.7@142.252,94.742 cw(c141.361,94.742) 141.991,94.112 cw(c142.621,93.482) J7.7@142.621,94.373
  Bottom Layer w0.254: J7.7@141.998,94.742 ccw(c140.494,94.742) 141.557,95.806 ccw(c142.621,96.869) J7.7@142.621,95.365 ; UART.1@142.125,105.664 cw(c140.621,105.664) 141.684,104.6 cw(c142.748,103.537) UART.1@142.748,105.041 ; J7.7@142.252,94.742 ccw(c141.361,94.742) 141.991,95.372 ccw(c142.621,96.002) J7.7@142.621,95.111 ; UART.1@142.379,105.664 cw(c141.488,105.664) 142.118,105.034 cw(c142.748,104.404) UART.1@142.748,105.295 ; J7.7@142.621,94.742 140.335,97.028 140.335,103.251 UART.1@142.748,105.664
IOB11: J7.6 SPCE061A.68 | length 26.7
  Top Layer w0.254: SPCE061A.68@127.762,82.017 136.652,90.907 136.652,90.932 141.351,90.932 J7.6@142.621,92.202 ; SPCE061A.68@127.762,82.398 ccw(c127.762,83.317) 128.412,82.667 ccw(c129.063,82.017) SPCE061A.68@128.143,82.017 ; SPCE061A.68@127.762,82.652 ccw(c127.762,84.185) 128.846,83.101 ccw(c129.93,82.017) SPCE061A.68@128.397,82.017 ; J7.6@141.998,92.202 cw(c140.494,92.202) 141.557,91.138 cw(c142.621,90.075) J7.6@142.621,91.579 ; J7.6@142.252,92.202 cw(c141.361,92.202) 141.991,91.572 cw(c142.621,90.942) J7.6@142.621,91.833
IOB12: J7.5 SPCE061A.67 | length 29.2
  Top Layer w0.254: SPCE061A.67@125.222,79.477 125.222,79.502 126.492,80.772 128.778,80.772 136.271,88.265 141.224,88.265 J7.5@142.621,89.662 ; SPCE061A.67@125.222,79.858 ccw(c125.222,80.716) 125.829,80.109 ; SPCE061A.67@125.222,80.112 ccw(c125.222,81.583) 126.263,80.543 ; SPCE061A.67@125.603,79.477 cw(c126.584,79.477) 125.89,80.17 ; SPCE061A.67@125.857,79.477 cw(c127.451,79.477) 126.324,80.604 ; J7.5@141.998,89.662 cw(c140.494,89.662) 141.557,88.598 cw(c142.621,87.535) J7.5@142.621,89.039 ; J7.5@142.252,89.662 cw(c141.361,89.662) 141.991,89.032 cw(c142.621,88.402) J7.5@142.621,89.293
IOB13: J7.4 SPCE061A.66 | length 25.6
  Top Layer w0.254: SPCE061A.66@127.762,79.477 130.023,79.477 136.525,85.979 141.478,85.979 J7.4@142.621,87.122 ; SPCE061A.66@128.031,79.207 cw(c128.682,78.557) 128.682,79.477 cw(c128.682,80.396) SPCE061A.66@128.031,79.746 ; SPCE061A.66@128.211,79.028 cw(c129.295,77.944) 129.295,79.477 cw(c129.295,81.01) SPCE061A.66@128.211,79.926 ; J7.4@141.998,87.122 cw(c140.494,87.122) 141.557,86.058 cw(c142.621,84.995) J7.4@142.621,86.499 ; J7.4@142.252,87.122 cw(c141.361,87.122) 141.991,86.492 cw(c142.621,85.862) J7.4@142.621,86.753
IOB14: J7.3 SPCE061A.65 | length 28.2
  Top Layer w0.254: SPCE061A.65@125.222,76.937 126.517,78.232 131.318,78.232 136.271,83.185 141.224,83.185 J7.3@142.621,84.582 ; SPCE061A.65@125.222,77.318 ccw(c125.222,78.237) 125.872,77.587 ccw(c126.523,76.937) SPCE061A.65@125.603,76.937 ; SPCE061A.65@125.222,77.572 ccw(c125.222,79.105) 126.306,78.021 ccw(c127.39,76.937) SPCE061A.65@125.857,76.937 ; J7.3@141.998,84.582 cw(c140.494,84.582) 141.557,83.518 cw(c142.621,82.455) J7.3@142.621,83.959 ; J7.3@142.252,84.582 cw(c141.361,84.582) 141.991,83.952 cw(c142.621,83.322) J7.3@142.621,84.213
IOB15: J7.2 SPCE061A.64 | length 24.6
  Top Layer w0.254: SPCE061A.64@127.762,76.937 132.309,76.937 136.017,80.645 141.224,80.645 J7.2@142.621,82.042 ; SPCE061A.64@128.031,76.667 cw(c128.682,76.017) 128.682,76.937 cw(c128.682,77.856) SPCE061A.64@128.031,77.206 ; SPCE061A.64@128.211,76.488 cw(c129.295,75.404) 129.295,76.937 cw(c129.295,78.47) SPCE061A.64@128.211,77.386 ; J7.2@141.998,82.042 cw(c140.494,82.042) 141.557,80.978 cw(c142.621,79.915) J7.2@142.621,81.419 ; J7.2@142.252,82.042 cw(c141.361,82.042) 141.991,81.412 cw(c142.621,80.782) J7.2@142.621,81.673
MICN: MIC.1 SPCE061A.28 | length 29.7
  Top Layer w0.254: MIC.1@93.472,49.784 98.425,54.737 98.425,68.174 SPCE061A.28@97.282,69.317 ; MIC.1@93.472,50.153 ccw(c93.472,51.044) 94.102,50.414 ccw(c94.732,49.784) MIC.1@93.841,49.784 ; MIC.1@93.472,50.407 ccw(c93.472,51.911) 94.536,50.848 ccw(c95.599,49.784) MIC.1@94.095,49.784 ; SPCE061A.28@97.282,68.682 cw(c97.282,67.149) 98.366,68.233 cw(c99.45,69.317) SPCE061A.28@97.917,69.317 ; SPCE061A.28@97.282,68.936 cw(c97.282,68.016) 97.932,68.666 cw(c98.583,69.317) SPCE061A.28@97.663,69.317
  Bottom Layer w0.254: SPCE061A.28@97.257,69.317 SPCE061A.28@97.282,69.317
MICP: MIC.2 SPCE061A.33 | length 21.1
  Top Layer w0.254: MIC.2@96.012,49.784 99.822,53.594 SPCE061A.33@99.822,61.697 ; MIC.2@96.012,50.153 ccw(c96.012,51.044) 96.642,50.414 ccw(c97.272,49.784) MIC.2@96.381,49.784 ; MIC.2@96.012,50.407 ccw(c96.012,51.911) 97.076,50.848 ccw(c98.139,49.784) MIC.2@96.635,49.784 ; SPCE061A.33@99.373,61.248 cw(c98.289,60.164) 99.822,60.164 cw(c101.355,60.164) SPCE061A.33@100.271,61.248 ; SPCE061A.33@99.553,61.427 cw(c98.902,60.777) 99.822,60.777 cw(c100.742,60.777) SPCE061A.33@100.091,61.427
Net32768_1: 32768.1 C14.2 SPCE061A.13 | length 23.3
  Top Layer w0.254: C14.2@89.662,91.948 C14.2@89.688,91.974
  Bottom Layer w0.254: C14.2@89.662,91.948 89.688,91.974 97.485,91.974 SPCE061A.13@99.822,89.637 ; C14.2@89.976,91.634 cw(c90.797,90.813) 90.797,91.974 ; C14.2@89.976,92.262 ccw(c90.671,92.957) 90.671,91.974 ; C14.2@90.156,91.454 cw(c91.41,90.2) 91.41,91.974 ; C14.2@90.156,92.442 ccw(c91.284,93.57) 91.284,91.974 ; 32768.1@93.102,91.604 ccw(c92.209,90.711) 92.209,91.974 ccw(c92.209,93.237) 32768.1@93.102,92.344 ; 32768.1@93.842,91.604 cw(c94.735,90.711) 94.735,91.974 cw(c94.735,93.237) 32768.1@93.842,92.344 ; SPCE061A.13@99.187,89.637 ccw(c97.654,89.637) 98.738,90.721 ccw(c99.822,91.805) SPCE061A.13@99.822,90.272 ; SPCE061A.13@99.441,89.637 ccw(c98.521,89.637) 99.172,90.287 ccw(c99.822,90.937) SPCE061A.13@99.822,90.018
Net32768_2: 32768.2 C15.1 SPCE061A.12 | length 16.8
  Bottom Layer w0.254: C15.1@89.662,87.884 90.652,88.874 96.519,88.874 ; C15.1@89.724,88.324 ccw(c89.817,88.988) 90.292,88.514 ccw(c90.766,88.039) C15.1@90.102,87.946 ; C15.1@89.759,88.575 ccw(c89.906,89.62) 90.652,88.874 ccw(c91.398,88.128) C15.1@90.353,87.981 ; 32768.2@93.102,88.504 ccw(c92.209,87.611) 92.209,88.874 ccw(c92.209,90.137) 32768.2@93.102,89.244 ; 32768.2@93.842,88.504 cw(c94.735,87.611) 94.735,88.874 cw(c94.735,90.137) 32768.2@93.842,89.244 ; SPCE061A.12@96.672,89.462 cw(c96.096,89.297) 96.519,88.874 ; SPCE061A.12@97.107,89.026 ccw(c96.942,88.451) 96.519,88.874 ; SPCE061A.12@97.282,89.637 96.519,88.874
NetC2_1: C2.1 R3.1 SPCE061A.25 | length 32.2
  Top Layer w0.254: C2.1@89.557,67.415 ccw(c88.69,68.282) 89.916,68.282 ccw(c91.142,68.282) 90.275,67.415 ccw(c91.142,68.282) 91.142,67.056 ccw(c91.142,65.83) C2.1@90.275,66.697 ; R3.1@92.559,70.334 ccw(c91.581,69.356) 91.581,70.739 ccw(c91.581,72.122) R3.1@92.559,71.144 ; R3.1@92.738,70.513 ccw(c92.194,69.969) 92.194,70.739 ccw(c92.194,71.509) R3.1@92.738,70.965 ; R3.1@92.964,70.739 90.932,70.739 89.916,69.723 C2.1@89.916,67.056 93.726,67.056 94.488,67.818 94.488,71.247 96.266,73.025 98.45,73.025 SPCE061A.25@99.822,74.397 ; SPCE061A.25@99.187,74.397 cw(c97.654,74.397) 98.738,73.313 cw(c99.822,72.229) SPCE061A.25@99.822,73.762 ; SPCE061A.25@99.441,74.397 cw(c98.521,74.397) 99.172,73.746 cw(c99.822,73.096) SPCE061A.25@99.822,74.016
NetC3_2: C3.2 R2.2 SPCE061A.8 | length 33.1
  Bottom Layer w0.254: C3.2@92.456,98.108 cw(c92.456,96.423) 93.648,97.614 cw(c94.839,98.806) C3.2@93.154,98.806 ; C3.2@92.456,98.362 cw(c92.456,97.29) 93.214,98.048 cw(c93.972,98.806) C3.2@92.9,98.806 ; C3.2@92.456,98.806 93.853,97.409 R2.2@93.853,96.012 98.679,96.012 101.092,93.599 101.092,91.821 101.981,90.932 103.607,90.932 SPCE061A.8@104.902,89.637 SPCE061A.8@104.902,89.662 ; R2.2@93.448,96.417 ccw(c92.47,97.395) 93.853,97.395 ccw(c95.236,97.395) 94.258,96.417 ccw(c95.236,97.395) 95.236,96.012 ccw(c95.236,94.629) R2.2@94.258,95.607 ; R2.2@93.627,96.238 ccw(c93.083,96.782) 93.853,96.782 ccw(c94.623,96.782) 94.079,96.238 ccw(c94.623,96.782) 94.623,96.012 ccw(c94.623,95.242) R2.2@94.079,95.786 ; SPCE061A.8@104.267,89.637 ccw(c102.734,89.637) 103.818,90.721 ccw(c104.902,91.805) SPCE061A.8@104.902,90.272 ; SPCE061A.8@104.521,89.637 ccw(c103.601,89.637) 104.252,90.287 ccw(c104.902,90.937) SPCE061A.8@104.902,90.018
NetC10_2: C10.2 R2.1 | length 11.1
  Bottom Layer w0.254: R2.1@85.574,96.417 ccw(c84.596,97.395) 85.979,97.395 ccw(c87.362,97.395) R2.1@86.384,96.417 ; R2.1@85.753,96.238 ccw(c85.209,96.782) 85.979,96.782 ccw(c86.749,96.782) R2.1@86.205,96.238 ; R2.1@85.979,96.012 85.979,97.409 C10.2@87.376,98.806 ; C10.2@86.678,98.806 cw(c84.993,98.806) 86.184,97.614 cw(c87.376,96.423) C10.2@87.376,98.108 ; C10.2@86.932,98.806 cw(c85.86,98.806) 86.618,98.048 cw(c87.376,97.29) C10.2@87.376,98.362